# EAGLE board Gemini (use in TinkerCad) (EAGLE 9.7.0)

Size 329.46 x 291.19 mm. Coordinates in mm from the lower left corner, seen from the top.
Outline: 0,0 329.46,0 329.46,291.19 0,291.19 0,0
Copper layers (1*16): Top 0.035mm / dielectric 1.5mm / Bottom 0.035mm
Design rules "default": minimum track width 6mil, minimum drill 0.35mm, track to track 6mil, track to pad 6mil, pad to pad 6mil, via to via 6mil, smd to smd 6mil, copper to edge 40mil, drill to drill 6mil, minimum pad ring 10mil, minimum via ring 8mil, stop-mask expansion 4mil, vias tented up to drill 0mil, thermal gap 10mil

## Footprints (pad centres in the part's own frame; a part is rotated, then mirrored left to right if it is on the bottom)
1X06 = drill 1.016 long: 1 -6.35,0; 2 -3.81,0; 3 -1.27,0; 4 1.27,0; 5 3.81,0; 6 6.35,0
SWITCH-MOMENTARY-PTH-6.5MM = drill 1.016 pad 1.88: 1 -3.251,2.261; 2 3.251,2.261; 3 -3.251,-2.261; 4 3.251,-2.261
TO92 = drill 0.813 octagon: 1 -1.27,0; 2 0,1.905; 3 1.27,0

## Placement (x,y rotation side)
M1  PINHD-1X06_1X06M  [1X06]  164.79,284.92 0 top
M2  PINHD-1X06_1X06M  [1X06]  6.27,146.62 90 top
M3  PINHD-1X06_1X06M  [1X06]  163.25,6.27 180 top
M4  PINHD-1X06_1X06M  [1X06]  323.19,147.96 270 top
S1  SWITCH_MOMENTARY  [SWITCH-MOMENTARY-PTH-6.5MM]  245.87,57.68 30 top
T1  NPN  [TO92]  259.77,89.42 240 top
T2  NPN  [TO92]  253.13,79.24 240 top

## Library data of the parts
M1-M4 S1 = Tinkercad
T1 T2 = Tinkercad; CATEGORY: Transistor; SUB-CATEGORY: BJT; TYPE: NPN

## Nets
S1_1: S1.1 S1.2 T1.1 T1.2
S1_3: S1.3 S1.4 T2.1 T2.2

## Tracks (layer width: path | path; a pad name or v marks a point on that pad's centre or on a via)
S1_1  (3 unrouted)
S1_3  (3 unrouted)